# Altium PCB MAGIsDebugger.PcbDoc (part 2 of 2)
Units mil, origin at the board's own origin, x right, y up, seen from the top; angles counter-clockwise.
Board outline 6000 x 4000 mil, 2 copper layers (Top Layer, Bottom Layer); 31 components, 29 nets, 170 pads, 25 vias.
Unrouted connection lines stored in the file: 4.
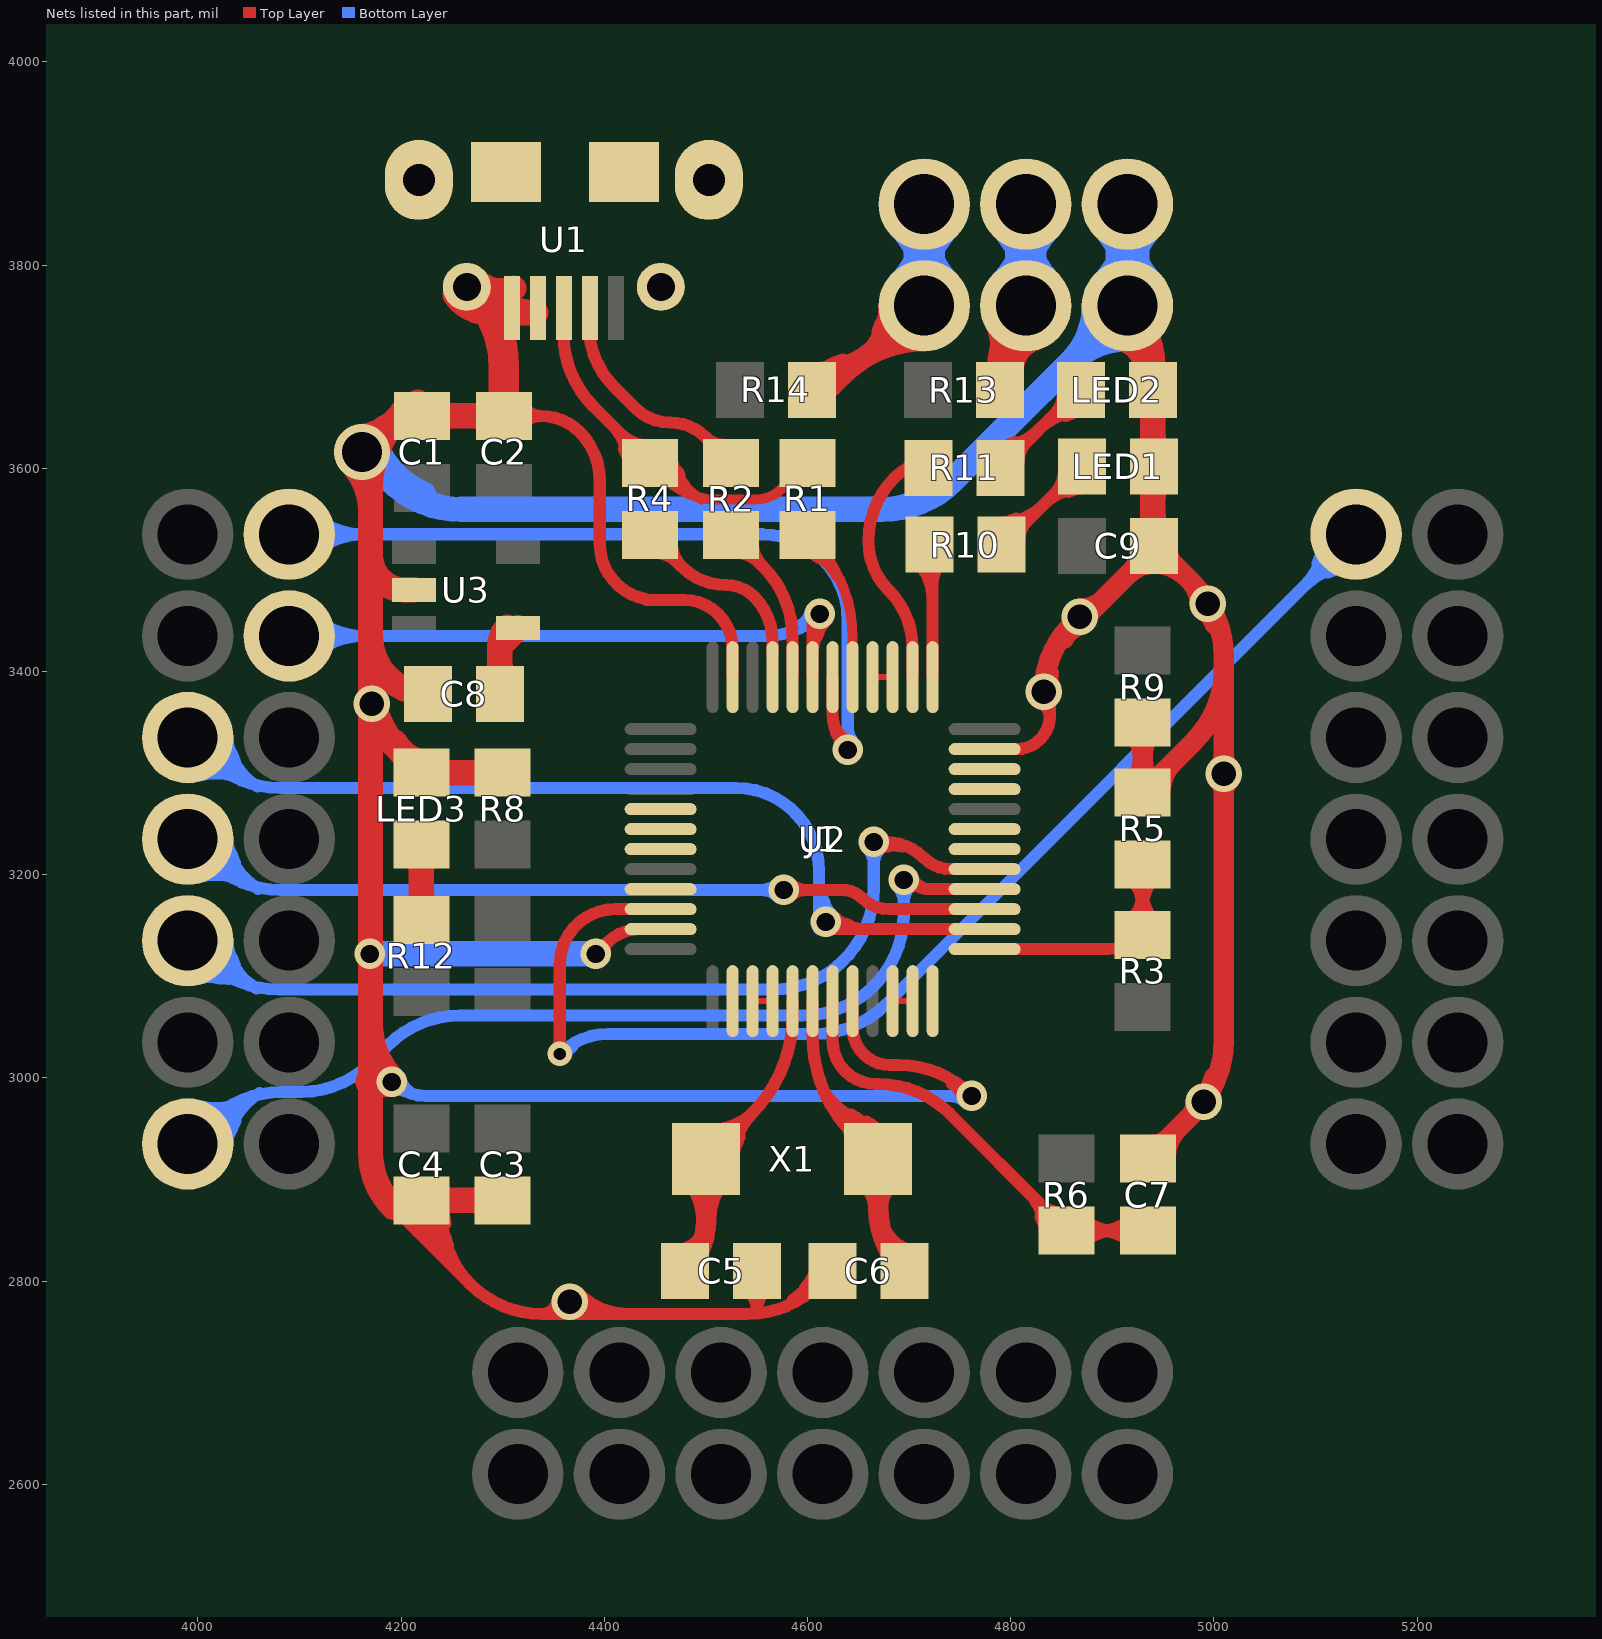
[diagram p2: the nets of this part, all layers, seen from the top]

## Via types
v1: diameter 30, hole 18, Top Layer to Bottom Layer, tented both sides, 10 vias
v2: diameter 36, hole 24, Top Layer to Bottom Layer, tented both sides, 7 vias
v3: diameter 24, hole 12, Top Layer to Bottom Layer, tented both sides, 5 vias
v4: diameter 47.24, hole 31.5, Top Layer to Bottom Layer, tented both sides, 1 vias
v5: diameter 55.12, hole 39.37, Top Layer to Bottom Layer, tented both sides, 1 vias
v6: diameter 31.5, hole 19.68, Top Layer to Bottom Layer, tented both sides, 1 vias

## Nets (pads, with @x,y where several pads share a name; then routed paths per layer and width w, separated by ;. In a path a pad name is that pad's centre, name@x,y a point inside that pad or via, vN(x,y) a via of type N, cw(c..) or ccw(c..) an arc to the next point about the centre after c; other vN are vias at no path point) (continued)
GND: C1.2 C2.2 C3.2 C4.2 C5.1 C6.1 C7.1 C8.2 C9.2 J1.1 LED1.2 LED2.2 LED3.2 R5.1 R8.1 R9.1 U1.0@4217.52,3883.86 U1.0@4264.76,3778.54 U1.0@4303.15,3891.73 U1.0@4419.29,3891.73 U1.0@4455.71,3778.54 U1.0@4502.95,3883.86 U1.4 U1.5 U2.2 U2.3 U2.4 U2.8 U2.10 U2.11 U2.12 U2.18 U2.19 U2.21 U2.22 U2.23 U2.27 U2.28 U2.35 U2.41 U2.42 U2.43 U2.45 U2.47 U3.2 | length 12117.1
  Top Layer w6: U2.3@4546.1,3075.55 U2.4@4565.79,3075.55 ; U2.28@4664.21,3394.45 U2.27@4683.9,3394.45 ; U2.10@4683.9,3075.55 U2.11@4703.58,3075.55 ; 4553.12,3075.55 cw(c4553.12,3082.57) 4548.16,3077.61 ccw(c4553.12,3082.57) 4553.12,3075.55 ; 4553.12,3075.55 ccw(c4553.12,3068.54) 4548.16,3073.5 cw(c4553.12,3068.54) 4553.12,3075.55 ; 4558.77,3075.55 cw(c4558.77,3068.54) 4563.73,3073.5 ccw(c4558.77,3068.54) 4558.77,3075.55 ; 4558.77,3075.55 ccw(c4558.77,3082.57) 4563.73,3077.61 cw(c4558.77,3082.57) 4558.77,3075.55 ; 4671.23,3394.45 cw(c4671.23,3401.46) 4666.27,3396.5 ccw(c4671.23,3401.46) 4671.23,3394.45 ; 4671.23,3394.45 ccw(c4671.23,3387.43) 4666.27,3392.39 cw(c4671.23,3387.43) 4671.23,3394.45 ; 4676.88,3394.45 cw(c4676.88,3387.43) 4681.84,3392.39 ccw(c4676.88,3387.43) 4676.88,3394.45 ; 4676.88,3394.45 ccw(c4676.88,3401.46) 4681.84,3396.5 cw(c4676.88,3401.46) 4676.88,3394.45 ; 4690.91,3075.55 cw(c4690.91,3082.57) 4685.95,3077.61 ccw(c4690.91,3082.57) 4690.91,3075.55 ; 4690.91,3075.55 ccw(c4690.91,3068.54) 4685.95,3073.5 cw(c4690.91,3068.54) 4690.91,3075.55 ; 4696.57,3075.55 cw(c4696.57,3068.54) 4701.53,3073.5 ccw(c4696.57,3068.54) 4696.57,3075.55 ; 4696.57,3075.55 ccw(c4696.57,3082.57) 4701.53,3077.61 cw(c4696.57,3082.57) 4696.57,3075.55
  Top Layer w12: 4192.44,2872.68 4268.11,2797.01 ; C4.2@4227.87,2884.59 cw(c4201.52,2850.97) C4.2@4243.93,2856.11 ; 4232.54,2853.73 ccw(c4200.66,2849.87) 4220.47,2875.14 cw(c4176.25,2818.72) 4247.41,2827.35 ; 4232.87,2851 cw(c4256.7,2853.89) C4.2@4237.81,2868.7 ; C2.2@4301.18,3651.57 4337.6,3651.57 ; v2@4354.25,2781.17 cw(c4338.82,2783.29) 4338.82,2767.72 ; v2(4366.14,2779.53) ccw(c4394.66,2808.04) 4394.66,2767.72 ; v2@4374.63,2788.01 ccw(c4423.63,2837.01) 4423.63,2767.72 ; v1(4391.73,3122.05) 4402.71,3133.03 ; U2.47@4455.55,3146.42 4435.04,3146.42 ccw(c4435.04,3100.7) 4402.71,3133.03 ; U2.35@4526.42,3394.45 4526.42,3422.4 ccw(c4478.35,3422.4) 4478.35,3470.47 4441.96,3470.47 cw(c4441.96,3471.33) 4441.1,3471.33 cw(c4450.79,3525.59) 4395.67,3525.59 4395.67,3587.99 ccw(c4328.18,3587.99) 4375.9,3635.71 ccw(c4337.6,3597.41) 4337.6,3651.57 ; 4549.02,2768.05 ccw(c4545.62,2771.45) 4550.43,2771.45 ; C5.1@4550.43,2810 4550.43,2771.45 ; 4597.22,2792.29 cw(c4614.63,2782.44) C6.1@4622.39,2800.88 ; 4599.02,2788.82 ccw(c4598.65,2831.53) C6.1@4629.12,2801.59 ; C6.1@4624.57,2810 4611.57,2797.01 cw(c4540.86,2867.72) 4540.86,2767.72 4338.82,2767.72 ; U2.8@4644.53,3075.55 4644.53,3049.24 ccw(c4681.1,3049.24) 4681.1,3012.67 4690.01,3012.67 cw(c4690.01,2912.67) 4760.72,2983.38 v1(4761.81,2982.28) ; 4744.63,2994.65 ccw(c4753.62,2999.84) v1@4758,2990.44 ; U2.23@4774.45,3323.58 4805.87,3323.58 ccw(c4805.87,3356.3) 4838.58,3356.3 4838.58,3365.66 ccw(c4818.42,3365.66) v2(4832.68,3379.92) ; 4268.11,2797.01 cw(c4334.9,2863.8) 4241.38,2877.09 ccw(c4334.9,2863.8) 4268.11,2797.01 ; 4268.11,2797.01 ccw(c4338.82,2867.72) 4338.82,2767.72 ; 4337.6,3651.57 cw(c4337.6,3672.7) 4319.89,3661.18 ccw(c4337.6,3672.7) 4337.6,3651.57 ; 4337.6,3651.57 ccw(c4337.6,3630.45) 4319.89,3641.97 cw(c4337.6,3630.45) 4337.6,3651.57 ; 4402.71,3133.03 cw(c4396.42,3139.31) 4394.09,3130.73 ccw(c4396.42,3139.31) 4402.71,3133.03 ; 4402.71,3133.03 ccw(c4409,3126.74) 4400.42,3124.41 cw(c4409,3126.74) 4402.71,3133.03 ; 4550.43,2771.45 cw(c4575.61,2771.45) 4560.8,2791.81 ccw(c4575.61,2771.45) 4550.43,2771.45 ; 4550.43,2771.45 ccw(c4525.26,2771.45) 4540.07,2791.81 cw(c4525.26,2771.45) 4550.43,2771.45 ; C4.2@4193.86,2883.84 ccw(c4215.92,2880.71) 4200.16,2864.95 cw(c4215.92,2880.71) C4.2@4193.86,2883.84 ; C4.2@4205.74,2882.15 ccw(c4245.66,2876.48) 4217.15,2847.97 cw(c4245.66,2876.48) C4.2@4205.74,2882.15 ; C4.2@4217.62,2880.46 ccw(c4275.41,2872.25) 4234.14,2830.98 cw(c4275.41,2872.25) C4.2@4217.62,2880.46 ; C4.2@4229.5,2878.78 ccw(c4305.15,2868.03) 4251.12,2813.99 cw(c4305.15,2868.03) C4.2@4229.5,2878.78 ; v1@4400.47,3124.2 cw(c4409.23,3126.37) 4404.72,3134.19 ccw(c4409.23,3126.37) v1@4400.47,3124.2 ; 4586.01,2781.95 ccw(c4562.32,2822.16) 4607.51,2810.48 cw(c4562.32,2822.16) 4586.01,2781.95 ; 4591.04,2784.91 cw(c4610.54,2751.81) 4620.15,2789 ccw(c4610.54,2751.81) 4591.04,2784.91 ; 4742.36,2993.98 cw(c4730.81,2973.98) 4753.12,2979.95 ccw(c4730.81,2973.98) 4742.36,2993.98 ; 4744.03,2993.01 ccw(c4754.21,3010.65) 4759.48,2990.98 cw(c4754.21,3010.65) 4744.03,2993.01 ; v2@4829.1,3368.47 cw(c4825.08,3355.57) 4838.58,3355.57 ccw(c4825.08,3355.57) v2@4829.1,3368.47
  Top Layer w20: v2(4832.68,3379.92) cw(c4925.92,3379.92) v2@4859.96,3445.83 ; 4853,3436.22 ccw(c4845.61,3449) v2@4860.05,3452.07 ; v2@4859.99,3445.85 v2(4867.87,3453.74) 4874,3453.74 C9.2@4940.94,3520.68 ; R9.1@4930,3349.57 R5.1@4930,3280.87 4980.55,3331.42 ccw(c4909.84,3402.13) 5009.84,3402.13 ; C7.1@4935,2920.43 4980.55,2965.99 ccw(c4909.84,3036.7) 5009.84,3036.7 5009.84,3402.13 ; C9.2@4940,3525.87 ccw(c4940.87,3525.87) 4940.87,3525 4980.55,3485.31 ; 4837.68,3398.58 cw(c4819.02,3403.58) 4828.68,3386.85 ccw(c4819.02,3403.58) 4837.68,3398.58 ; 4837.68,3398.58 ccw(c4856.33,3393.58) 4839.61,3383.92 cw(c4856.33,3393.58) 4837.68,3398.58 ; 4930,3313.75 cw(c4897.11,3313.75) 4920.37,3290.5 ccw(c4897.11,3313.75) 4930,3313.75 ; 4930,3313.75 ccw(c4962.89,3313.75) 4939.63,3290.5 cw(c4962.89,3313.75) 4930,3313.75 ; 4930,3316.68 cw(c4962.89,3316.68) 4939.63,3339.93 ccw(c4962.89,3316.68) 4930,3316.68 ; 4930,3316.68 ccw(c4897.11,3316.68) 4920.37,3339.93 cw(c4897.11,3316.68) 4930,3316.68 ; C9.2@4940.94,3506.06 cw(c4940.94,3460.54) 4973.14,3492.73 ccw(c4940.94,3460.54) C9.2@4940.94,3506.06 ; C9.2@4940.94,3506.06 ccw(c4940.94,3470.78) 4915.99,3495.73 cw(c4940.94,3470.78) C9.2@4940.94,3506.06 ; 4980.55,3485.31 cw(c4966.3,3471.05) 4986.2,3467.82 ccw(c4966.3,3471.05) 4980.55,3485.31 ; 4980.55,3485.31 cw(c4909.84,3414.6) 5009.84,3414.6 5009.84,3402.13 ; 5009.84,3279.9 cw(c5029.16,3279.9) 5015.5,3293.56 ccw(c5029.16,3279.9) 5009.84,3279.9 ; 5009.84,3279.9 ccw(c4990.53,3279.9) 5004.19,3293.56 cw(c4990.53,3279.9) 5009.84,3279.9 ; 5009.84,3318.53 cw(c4990.53,3318.53) 5004.19,3304.87 ccw(c4990.53,3318.53) 5009.84,3318.53 ; 5009.84,3318.53 ccw(c5029.16,3318.53) 5015.5,3304.87 cw(c5029.16,3318.53) 5009.84,3318.53 ; 4852.21,3432.39 cw(c4877.52,3417.79) 4869.95,3446.01 ccw(c4877.52,3417.79) 4852.21,3432.39 ; v2@4867.87,3461.74 ccw(c4867.87,3495.85) 4892,3471.73 cw(c4867.87,3495.85) v2@4867.87,3461.74 ; C9.2@4918.39,3498.13 ccw(c4896.84,3519.69) 4927.32,3519.69 cw(c4896.84,3519.69) C9.2@4918.39,3498.13 ; R5.1@4933.94,3294.49 ccw(c4933.94,3317.87) 4950.47,3301.34 cw(c4933.94,3317.87) R5.1@4933.94,3294.49 ; C7.1@4938.94,2934.06 ccw(c4938.94,2957.44) 4955.47,2940.9 cw(c4938.94,2957.44) C7.1@4938.94,2934.06 ; R5.1@4947.56,3280.87 cw(c4989.95,3280.87) 4959.98,3310.84 ccw(c4989.95,3280.87) R5.1@4947.56,3280.87 ; C7.1@4952.56,2920.43 cw(c4994.95,2920.43) 4964.98,2950.41 ccw(c4994.95,2920.43) C7.1@4952.56,2920.43 ; C9.2@4954.57,3519.69 ccw(c4974.81,3519.69) 4960.5,3505.37 cw(c4974.81,3519.69) C9.2@4954.57,3519.69 ; 4975.94,2961.38 ccw(c4960.94,2976.38) 4982.16,2976.38 cw(c4960.94,2976.38) 4975.94,2961.38 ; 4976.74,3489.13 cw(c4954.14,3466.54) 4986.09,3466.54 ccw(c4954.14,3466.54) 4976.74,3489.13 ; 4981.25,3484.43 cw(c4963.18,3470.03) 4986.15,3467.43 ccw(c4963.18,3470.03) 4981.25,3484.43 ; v2@4990.22,3459.53 cw(c4979.6,3440.32) 5000.69,3446.39 ccw(c4979.6,3440.32) v2@4990.22,3459.53 ; v2@4997.88,2978.45 cw(c5026.84,2986.21) 5000.88,3001.19 ccw(c5026.84,2986.21) v2@4997.88,2978.45
  Top Layer w25: v5@4176.31,3618.35 cw(c4198.29,3621.62) 4188.03,3641.33 ; v5@4176.34,3614.1 cw(c4220.32,3608.08) C1.2@4199.83,3647.47 ; 4181.78,3638.07 cw(c4199.14,3619.13) C1.2@4211.28,3641.77 ; 4192.44,2872.68 cw(c4246.62,2926.85) 4170,2926.85 4170,2996.06 4170,3391.85 ; U3.2@4212.6,3480.32 4203.46,3480.32 cw(c4203.46,3513.78) 4170,3513.78 ; C1.2@4216.37,3665.19 cw(c4209.65,3671.91) 4209.65,3662.4 4199.29,3652.05 ccw(c4270,3581.33) 4170,3581.33 4170,3513.78 ; C4.2@4220,2879.57 C3.2@4300,2879.57 ; C1.2@4220.47,3651.57 C2.2@4301.18,3651.57 ; C8.2@4226.38,3377.95 cw(c4226.38,3434.33) 4170,3434.33 ; U1.0@4268.26,3767.99 cw(c4278.56,3736.9) 4300.28,3761.4 ; U1.0@4277.7,3781.8 ccw(c4298.17,3807.84) U1.5@4310.82,3777.22 ; 4286.14,3753.45 ccw(c4290.19,3778.54) 4290.19,3753.12 U1.4@4332.68,3753.12 ; R8.1@4300,3300.43 LED3.2@4220,3300.43 4199.29,3321.14 cw(c4270,3391.85) 4170,3391.85 ; U1.5@4311.31,3755.37 ccw(c4316.91,3762.48) 4320.36,3754.11 ; J1.1@4915,3760 cw(c4854.64,3699.64) 4940,3699.64 C9.2@4940,3525.87 ; 4930.24,3710.8 ccw(c4962.17,3719.36) LED2.2@4945.64,3690.73 ; 4170,3391.85 4170,3434.33 ; 4170,3434.33 4170,3513.78 ; 4250.79,2879.57 cw(c4250.79,2906.42) 4231.8,2887.43 ccw(c4250.79,2906.42) 4250.79,2879.57 ; 4250.79,2879.57 ccw(c4250.79,2852.72) 4231.8,2871.7 cw(c4250.79,2852.72) 4250.79,2879.57 ; 4250.79,3300.43 cw(c4250.79,3327.28) 4231.8,3308.3 ccw(c4250.79,3327.28) 4250.79,3300.43 ; 4250.79,3300.43 ccw(c4250.79,3273.58) 4231.8,3292.57 cw(c4250.79,3273.58) 4250.79,3300.43 ; 4251.26,3651.57 cw(c4251.26,3678.43) 4232.27,3659.44 ccw(c4251.26,3678.43) 4251.26,3651.57 ; 4251.26,3651.57 ccw(c4251.26,3624.72) 4232.27,3643.71 cw(c4251.26,3624.72) 4251.26,3651.57 ; 4269.21,2879.57 cw(c4269.21,2852.72) 4288.2,2871.7 ccw(c4269.21,2852.72) 4269.21,2879.57 ; 4269.21,2879.57 ccw(c4269.21,2906.42) 4288.2,2887.43 cw(c4269.21,2906.42) 4269.21,2879.57 ; 4269.21,3300.43 cw(c4269.21,3273.58) 4288.2,3292.57 ccw(c4269.21,3273.58) 4269.21,3300.43 ; 4269.21,3300.43 ccw(c4269.21,3327.28) 4288.2,3308.3 cw(c4269.21,3327.28) 4269.21,3300.43 ; 4270.39,3651.57 cw(c4270.39,3624.72) 4289.38,3643.71 ccw(c4270.39,3624.72) 4270.39,3651.57 ; 4270.39,3651.57 ccw(c4270.39,3678.43) 4289.38,3659.44 cw(c4270.39,3678.43) 4270.39,3651.57 ; J1.1@4907.54,3728.37 cw(c4899.44,3694.01) LED2.2@4934.74,3694.01 ; J1.1@4907.54,3728.37 cw(c4899.44,3694.01) LED2.2@4934.74,3694.01 ; J1.1@4907.54,3728.37 cw(c4899.44,3694.01) LED2.2@4934.74,3694.01 ; v5@4150.77,3605.49 cw(c4104.34,3559.07) 4170,3559.07 ccw(c4104.34,3559.07) v5@4150.77,3605.49 ; v5@4155.49,3602.3 cw(c4146.06,3580.29) 4170,3580.29 ccw(c4146.06,3580.29) v5@4155.49,3602.3 ; v5@4160.03,3631.14 ccw(c4154.85,3687.35) 4202.45,3657.01 cw(c4154.85,3687.35) v5@4160.03,3631.14 ; 4170,3052.66 ccw(c4247.55,3052.66) 4192.71,2997.83 cw(c4247.55,3052.66) 4170,3052.66 ; 4186.88,2882.31 ccw(c4215.68,2898.94) 4216.34,2865.69 cw(c4215.68,2898.94) 4186.88,2882.31 ; 4193.99,3330.32 ccw(c4229.58,3350.87) 4218.94,3311.18 cw(c4229.58,3350.87) 4193.99,3330.32 ; U1.0@4253.18,3770.9 ccw(c4286.22,3792.7) 4286.22,3753.12 cw(c4286.22,3792.7) U1.0@4253.18,3770.9 ; U1.0@4274.05,3784.67 ccw(c4332.67,3823.37) 4332.67,3753.12 cw(c4332.67,3823.37) U1.0@4274.05,3784.67 ; LED2.2@4930.45,3686.66 ccw(c4893.23,3708.15) 4934.74,3719.27 cw(c4893.23,3708.15) LED2.2@4930.45,3686.66 ; LED2.2@4932.21,3665.36 cw(c4913.42,3646.57) 4940,3646.57 ccw(c4913.42,3646.57) LED2.2@4932.21,3665.36 ; C9.2@4933.08,3535.42 ccw(c4916.38,3552.13) 4940,3552.13 cw(c4916.38,3552.13) C9.2@4933.08,3535.42 ; LED1.2@4933.08,3589.97 cw(c4916.37,3573.26) 4940,3573.26 ccw(c4916.37,3573.26) LED1.2@4933.08,3589.97 ; LED1.2@4933.08,3613.57 ccw(c4916.37,3630.28) 4940,3630.28 cw(c4916.37,3630.28) LED1.2@4933.08,3613.57 ; 4940,3556.69 ccw(c4970.08,3556.69) 4948.81,3535.42 cw(c4970.08,3556.69) 4940,3556.69 ; 4940,3568.7 cw(c4970.08,3568.7) 4948.81,3589.97 ccw(c4970.08,3568.7) 4940,3568.7 ; 4940,3634.84 ccw(c4970.08,3634.84) 4948.81,3613.57 cw(c4970.08,3634.84) 4940,3634.84 ; 4940,3646.19 cw(c4967.12,3646.19) 4947.94,3665.36 ccw(c4967.12,3646.19) 4940,3646.19
  Top Layer w30: 4170,2996.06 v1(4190.94,2996.06) ; U1.0@4264.76,3778.54 4271.89,3771.42 cw(c4201.18,3700.7) 4286.14,3753.45 cw(c4201.18,3700.7) 4301.18,3700.7 C2.2@4301.18,3651.57 ; U1.0@4263.78,3769.98 cw(c4260.94,3745.38) 4280.34,3760.77 ccw(c4260.94,3745.38) U1.0@4263.78,3769.98
  Bottom Layer w12: v1(4190.94,2996.06) ccw(c4224.21,3029.33) 4224.21,2982.28 v1(4761.81,2982.28) ; 4209.76,2985.2 cw(c4220.63,3004.02) 4199.64,2998.39 ccw(c4220.63,3004.02) 4209.76,2985.2 ; 4209.76,2985.2 ccw(c4198.9,2966.38) 4193.27,2987.37 cw(c4198.9,2966.38) 4209.76,2985.2 ; 4740.08,2982.28 cw(c4740.08,2960.56) 4755.45,2975.92 ccw(c4740.08,2960.56) 4740.08,2982.28 ; 4740.08,2982.28 ccw(c4740.08,3004.01) 4755.45,2988.65 cw(c4740.08,3004.01) 4740.08,2982.28
  Bottom Layer w25: v5(4161.42,3616.14) 4188.77,3588.79 ccw(c4259.48,3659.5) 4259.48,3559.5 4673.08,3559.5 ccw(c4673.08,3659.5) 4743.79,3588.79 J1.1@4915,3760 ; v5@4162.93,3601.16 cw(c4167.62,3554.57) 4204.92,3582.88 ; v1(4169.29,3122.05) v1(4391.73,3122.05) ; 4859.52,3704.52 cw(c4915,3649.04) 4915,3727.5 ccw(c4915,3649.04) 4859.52,3704.52 ; 4859.52,3704.52 ccw(c4804.04,3760) 4882.5,3760 cw(c4804.04,3760) 4859.52,3704.52 ; v5@4175.36,3621.83 ccw(c4255.56,3654.54) 4221.98,3574.7 cw(c4255.56,3654.54) v5@4175.36,3621.83
  Bottom Layer w30: J1.1@4898.36,3784.96 ccw(c4884.69,3805.47) 4908.5,3811.85 ccw(c4947.16,3822.2) J1.1@4928.78,3786.65 ; J1.1@4901.22,3786.65 ccw(c4882.84,3822.2) 4921.5,3811.84 ccw(c4945.31,3805.47) J1.1@4931.64,3784.96 ; J1.1@4915,3760 J1.1@4915,3860 ; J1.1@4898.36,3835.04 cw(c4884.69,3814.53) 4908.5,3808.15 ; J1.1@4898.36,3835.04 cw(c4884.69,3814.53) 4908.5,3808.15 ; J1.1@4898.36,3835.04 cw(c4884.69,3814.53) 4908.5,3808.15 ; J1.1@4901.22,3833.35 cw(c4882.84,3797.8) 4921.5,3808.16 ; J1.1@4901.22,3833.35 cw(c4882.84,3797.8) 4921.5,3808.16 ; J1.1@4901.22,3833.35 cw(c4882.84,3797.8) 4921.5,3808.16 ; 4908.5,3808.16 cw(c4947.16,3797.8) J1.1@4928.78,3833.35 ; 4908.5,3808.16 cw(c4947.16,3797.8) J1.1@4928.78,3833.35 ; 4908.5,3808.16 cw(c4947.16,3797.8) J1.1@4928.78,3833.35 ; J1.1@4915,3787.57 cw(c4987.43,3787.57) 4936.21,3838.79 ccw(c4987.43,3787.57) J1.1@4915,3787.57 ; J1.1@4915,3787.57 ccw(c4842.57,3787.57) 4893.79,3838.79 cw(c4842.57,3787.57) J1.1@4915,3787.57 ; J1.1@4915,3832.43 cw(c4842.57,3832.43) 4893.79,3781.21 ccw(c4842.57,3832.43) J1.1@4915,3832.43 ; J1.1@4915,3832.43 ccw(c4987.43,3832.43) 4936.21,3781.21 cw(c4987.43,3832.43) J1.1@4915,3832.43 ; 4921.5,3808.15 cw(c4945.31,3814.53) J1.1@4931.64,3835.04 ; 4921.5,3808.15 cw(c4945.31,3814.53) J1.1@4931.64,3835.04 ; 4921.5,3808.15 cw(c4945.31,3814.53) J1.1@4931.64,3835.04
  other v2: 4990.16,2976.38 5009.84,3299.21 4171.26,3368.11 4994.09,3466.54
GRN: R10.2 U2.25 | length 265.1
  Top Layer w12: R10.2@4720,3525 cw(c4712.11,3517.11) 4723.27,3517.11 U2.25@4723.27,3394.45 ; R10.2@4707.54,3508.6 cw(c4669.57,3470.63) 4723.27,3470.63 ccw(c4669.57,3470.63) R10.2@4707.54,3508.6 ; 4723.27,3486.41 cw(c4754.65,3486.41) 4732.46,3508.6 ccw(c4754.65,3486.41) 4723.27,3486.41
NetC8_1: C8.1 U3.4 | length 270.6
  Top Layer w25: C8.1@4297.24,3377.95 4297.24,3425.2 U3.4@4314.96,3442.91 ; 4297.24,3408.74 cw(c4270.39,3408.74) 4289.38,3389.75 ccw(c4270.39,3408.74) 4297.24,3408.74 ; 4297.24,3408.74 ccw(c4324.09,3408.74) 4305.11,3389.75 cw(c4324.09,3408.74) 4297.24,3408.74 ; 4297.24,3425.57 cw(c4322.46,3425.57) U3.4@4304.63,3443.4 ; 4297.24,3425.57 cw(c4322.46,3425.57) U3.4@4304.63,3443.4 ; 4297.24,3425.57 cw(c4322.46,3425.57) U3.4@4304.63,3443.4 ; 4297.24,3425.57 cw(c4322.46,3425.57) U3.4@4304.63,3443.4 ; 4299.33,3427.29 ccw(c4283.71,3442.91) 4305.81,3442.91 cw(c4283.71,3442.91) 4299.33,3427.29
NetJ1_2: J1.2 R13.2 | length 1912.9
  Top Layer w25: R13.2@4781.89,3689.33 ccw(c4753.01,3721.07) 4795.87,3719.04 ; J1.2@4786.12,3745.1 cw(c4733.9,3718.15) R13.2@4789.88,3700.28 ; R13.2@4786.65,3690.15 cw(c4844.23,3671.77) J1.2@4825.22,3729.15 ; J1.2@4788.66,3740.96 cw(c4761.66,3721.44) 4793.4,3711.31 cw(c4815.57,3704.23) J1.2@4815.33,3727.5 ; R13.2@4789.37,3677.17 4789.37,3698.12 cw(c4876.88,3698.12) J1.2@4815,3760 ; R13.2@4800.24,3683.47 cw(c4839.42,3692.01) 4805.67,3713.68 ; J1.2@4788.21,3741.6 cw(c4745.73,3712.44) R13.2@4794.82,3696.77 ; J1.2@4788.21,3741.6 cw(c4745.73,3712.44) R13.2@4794.82,3696.77 ; J1.2@4788.21,3741.6 cw(c4745.73,3712.44) R13.2@4794.82,3696.77 ; J1.2@4791.76,3737.28 cw(c4779.91,3725.69) 4794.82,3718.45 ; J1.2@4791.76,3737.28 cw(c4779.91,3725.69) 4794.82,3718.45 ; J1.2@4791.76,3737.28 cw(c4779.91,3725.69) 4794.82,3718.45 ; 4792.35,3720.77 cw(c4805.61,3713.12) 4808.62,3728.13 ccw(c4805.61,3713.12) 4792.35,3720.77 ; 4792.35,3720.77 ccw(c4779.09,3728.43) 4790.59,3738.54 cw(c4779.09,3728.43) 4792.35,3720.77 ; R13.2@4794.82,3696.77 cw(c4843.9,3681.1) J1.2@4826.18,3729.48 ; R13.2@4794.82,3696.77 cw(c4843.9,3681.1) J1.2@4826.18,3729.48 ; R13.2@4794.82,3696.77 cw(c4843.9,3681.1) J1.2@4826.18,3729.48 ; 4794.82,3718.45 cw(c4809.72,3711.21) J1.2@4811.51,3727.69 ; 4794.82,3718.45 cw(c4809.72,3711.21) J1.2@4811.51,3727.69 ; 4794.82,3718.45 ccw(c4835.28,3707.61) 4799,3686.66 cw(c4835.28,3707.61) 4794.82,3718.45 ; 4794.82,3718.45 cw(c4809.72,3711.21) J1.2@4811.51,3727.69
  Bottom Layer w25: J1.2@4797.62,3787.46 ccw(c4786.01,3805.82) 4806.99,3811.44 ccw(c4836.66,3819.39) J1.2@4826.13,3790.53 ; J1.2@4803.87,3790.53 ccw(c4793.34,3819.39) 4823.01,3811.44 ccw(c4843.99,3805.82) J1.2@4832.38,3787.46 ; J1.2@4815,3760 J1.2@4815,3860 ; J1.2@4797.62,3832.54 cw(c4786.01,3814.18) 4806.99,3808.56 ; J1.2@4797.62,3832.54 cw(c4786.01,3814.18) 4806.99,3808.56 ; J1.2@4797.62,3832.54 cw(c4786.01,3814.18) 4806.99,3808.56 ; J1.2@4803.87,3829.47 cw(c4793.34,3800.61) 4823.01,3808.56 ; J1.2@4803.87,3829.47 cw(c4793.34,3800.61) 4823.01,3808.56 ; J1.2@4803.87,3829.47 cw(c4793.34,3800.61) 4823.01,3808.56 ; 4806.99,3808.56 cw(c4836.66,3800.61) J1.2@4826.13,3829.47 ; 4806.99,3808.56 cw(c4836.66,3800.61) J1.2@4826.13,3829.47 ; 4806.99,3808.56 cw(c4836.66,3800.61) J1.2@4826.13,3829.47 ; J1.2@4815,3781.54 cw(c4893.46,3781.54) 4837.98,3837.02 ccw(c4893.46,3781.54) J1.2@4815,3781.54 ; J1.2@4815,3781.54 ccw(c4736.54,3781.54) 4792.02,3837.02 cw(c4736.54,3781.54) J1.2@4815,3781.54 ; J1.2@4815,3838.46 cw(c4736.54,3838.46) 4792.02,3782.98 ccw(c4736.54,3838.46) J1.2@4815,3838.46 ; J1.2@4815,3838.46 ccw(c4893.46,3838.46) 4837.98,3782.98 cw(c4893.46,3838.46) J1.2@4815,3838.46 ; 4823.01,3808.56 cw(c4843.99,3814.18) J1.2@4832.38,3832.54 ; 4823.01,3808.56 cw(c4843.99,3814.18) J1.2@4832.38,3832.54 ; 4823.01,3808.56 cw(c4843.99,3814.18) J1.2@4832.38,3832.54
NetJ1_3: J1.3 R14.2 | length 1991.3
  Top Layer w16: R14.2@4604,3681.29 cw(c4647.83,3655.99) 4634.73,3704.87 ; R14.2@4615.39,3692.13 ccw(c4626.92,3703.62) 4631.13,3687.9 ccw(c4635.54,3671.43) R14.2@4619.25,3676.48 ; R14.2@4617.15,3689.99 R14.2@4604.33,3677.17 ccw(c4604.33,3704.38) 4623.57,3685.13 4625.54,3679.23 J1.3@4688.7,3742.38 ; 4671.07,3734.15 cw(c4719.43,3721.19) J1.3@4713.75,3770.93 ; 4681.27,3729.96 cw(c4686.46,3710.58) J1.3@4696.5,3727.96 ; J1.3@4686.73,3748.29 cw(c4715,3720.02) J1.3@4715,3760 ; R14.2@4604.33,3680.72 ccw(c4604.33,3735.54) 4643.09,3696.78 cw(c4604.33,3735.54) R14.2@4604.33,3680.72 ; R14.2@4604.33,3696.72 ccw(c4604.33,3790.17) 4670.41,3724.09 cw(c4604.33,3790.17) R14.2@4604.33,3696.72 ; 4637.01,3690.69 cw(c4715,3612.7) 4715,3723 ccw(c4715,3612.7) 4637.01,3690.69 ; 4657.98,3711.67 ccw(c4609.65,3760) 4678,3760 cw(c4609.65,3760) 4657.98,3711.67 ; 4664.32,3718.01 cw(c4715,3667.33) 4715,3739 ccw(c4715,3667.33) 4664.32,3718.01
  Bottom Layer w25: J1.3@4697.62,3787.46 ccw(c4686.01,3805.82) 4706.99,3811.44 ccw(c4736.66,3819.39) J1.3@4726.13,3790.53 ; J1.3@4703.87,3790.53 ccw(c4693.34,3819.39) 4723.01,3811.44 ccw(c4743.99,3805.82) J1.3@4732.38,3787.46 ; J1.3@4715,3760 J1.3@4715,3860 ; J1.3@4697.62,3832.54 cw(c4686.01,3814.18) 4706.99,3808.56 ; J1.3@4697.62,3832.54 cw(c4686.01,3814.18) 4706.99,3808.56 ; J1.3@4697.62,3832.54 cw(c4686.01,3814.18) 4706.99,3808.56 ; J1.3@4703.87,3829.47 cw(c4693.34,3800.61) 4723.01,3808.56 ; J1.3@4703.87,3829.47 cw(c4693.34,3800.61) 4723.01,3808.56 ; J1.3@4703.87,3829.47 cw(c4693.34,3800.61) 4723.01,3808.56 ; 4706.99,3808.56 cw(c4736.66,3800.61) J1.3@4726.13,3829.47 ; 4706.99,3808.56 cw(c4736.66,3800.61) J1.3@4726.13,3829.47 ; 4706.99,3808.56 cw(c4736.66,3800.61) J1.3@4726.13,3829.47 ; J1.3@4715,3781.54 cw(c4793.46,3781.54) 4737.98,3837.02 ccw(c4793.46,3781.54) J1.3@4715,3781.54 ; J1.3@4715,3781.54 ccw(c4636.54,3781.54) 4692.02,3837.02 cw(c4636.54,3781.54) J1.3@4715,3781.54 ; J1.3@4715,3838.46 cw(c4636.54,3838.46) 4692.02,3782.98 ccw(c4636.54,3838.46) J1.3@4715,3838.46 ; J1.3@4715,3838.46 ccw(c4793.46,3838.46) 4737.98,3782.98 cw(c4793.46,3838.46) J1.3@4715,3838.46 ; 4723.01,3808.56 cw(c4743.99,3814.18) J1.3@4732.38,3832.54 ; 4723.01,3808.56 cw(c4743.99,3814.18) J1.3@4732.38,3832.54 ; 4723.01,3808.56 cw(c4743.99,3814.18) J1.3@4732.38,3832.54
NetLED1_1: LED1.1 R10.1 | length 482.3
  Top Layer w12: R10.1@4784.81,3530.93 cw(c4813.2,3521.61) R10.1@4805.46,3550.47 ; R10.1@4790.87,3525 ccw(c4790.87,3530.89) 4795.03,3526.73 LED1.1@4870.08,3601.77 ; LED1.1@4856.39,3576.54 ccw(c4849.09,3603.77) LED1.1@4876.22,3596.1 ; R10.1@4790.87,3534.56 ccw(c4790.87,3563.53) 4811.35,3543.04 cw(c4790.87,3563.53) R10.1@4790.87,3534.56 ; R10.1@4790.87,3546.56 ccw(c4790.87,3604.5) 4831.84,3563.53 cw(c4790.87,3604.5) R10.1@4790.87,3546.56 ; R10.1@4808.49,3528.94 cw(c4835.63,3528.94) 4816.44,3548.13 ccw(c4835.63,3528.94) R10.1@4808.49,3528.94 ; 4833.28,3564.97 cw(c4870.08,3528.16) 4870.08,3580.21 ccw(c4870.08,3528.16) 4833.28,3564.97 ; 4842.78,3574.47 ccw(c4819.42,3597.83) 4852.46,3597.83 cw(c4819.42,3597.83) 4842.78,3574.47
NetLED2_1: LED2.1 R11.1 | length 482.3
  Top Layer w12: R11.1@4783.86,3606.07 cw(c4810.99,3598.39) R11.1@4803.69,3625.62 ; R11.1@4790,3600.39 4865.05,3675.44 cw(c4869.21,3671.27) LED2.1@4869.21,3677.17 ; LED2.1@4854.62,3651.7 ccw(c4846.88,3680.56) LED2.1@4875.27,3671.24 ; R11.1@4790,3621.95 ccw(c4790,3674) 4826.8,3637.2 cw(c4790,3674) R11.1@4790,3621.95 ; R11.1@4807.62,3604.33 cw(c4840.66,3604.33) 4817.3,3627.69 ccw(c4840.66,3604.33) R11.1@4807.62,3604.33 ; 4828.24,3638.64 cw(c4869.21,3597.67) 4869.21,3655.61 ccw(c4869.21,3597.67) 4828.24,3638.64 ; 4843.64,3654.03 ccw(c4824.44,3673.23) 4851.59,3673.23 cw(c4824.44,3673.23) 4843.64,3654.03 ; LED2.1@4848.73,3659.12 cw(c4869.21,3638.64) 4869.21,3667.61 ccw(c4869.21,3638.64) LED2.1@4848.73,3659.12
NetLED3_1: LED3.1 R12.1 | length 242.8
  Top Layer w25: R12.1@4220,3155.43 LED3.1@4220,3229.57 ; 4220,3182.28 cw(c4193.15,3182.28) 4212.14,3163.3 ccw(c4193.15,3182.28) 4220,3182.28 ; 4220,3182.28 ccw(c4246.85,3182.28) 4227.86,3163.3 cw(c4246.85,3182.28) 4220,3182.28 ; 4220,3202.72 cw(c4246.85,3202.72) 4227.86,3221.7 ccw(c4246.85,3202.72) 4220,3202.72 ; 4220,3202.72 ccw(c4193.15,3202.72) 4212.14,3221.7 cw(c4193.15,3202.72) 4220,3202.72
NetR1_2: R1.2 U2.29 | length 421.6
  Top Layer w10: R1.2@4600,3534.57 4604.69,3529.87 cw(c4508.53,3433.71) 4644.53,3433.71 U2.29@4644.53,3394.45 ; R1.2@4602.68,3535.13 ccw(c4619.71,3527.45) 4611.35,3510.74 ; R1.2@4611.49,3543.08 cw(c4588.96,3517.69) R1.2@4622.84,3519.71 ; R1.2@4611.8,3531.02 ccw(c4629.2,3523.16) 4620.65,3506.08 ; R1.2@4600.2,3516.32 cw(c4592.5,3478.81) 4624.47,3499.9 ccw(c4592.5,3478.81) R1.2@4600.2,3516.32 ; R1.2@4612.38,3532.83 ccw(c4639.31,3527.31) 4616.37,3512.18 cw(c4639.31,3527.31) R1.2@4612.38,3532.83 ; R1.2@4622.18,3530.83 ccw(c4672.75,3520.46) 4629.66,3492.03 cw(c4672.75,3520.46) R1.2@4622.18,3530.83
NetR2_2: R2.2 U2.32 | length 275.9
  Top Layer w12: R2.2@4525,3534.57 4556.18,3503.38 ; U2.32@4585.47,3394.45 4585.47,3432.67 ccw(c4485.47,3432.67) 4556.18,3503.38 ; 4556.18,3503.39 cw(c4580.51,3527.71) 4546.41,3532.24 ccw(c4580.51,3527.71) 4556.18,3503.39 ; R2.2@4528.94,3516.94 cw(c4528.94,3483.91) 4552.3,3507.27 ccw(c4528.94,3483.91) R2.2@4528.94,3516.94
NetR4_2: R4.2 U2.33 | length 303.6
  Top Layer w12: R4.2@4445,3534.57 4476.58,3502.98 ; U2.33@4565.79,3414.81 4565.79,3429.86 ccw(c4504.03,3429.86) 4547.7,3473.53 ccw(c4520,3445.83) 4520,3485 cw(c4520,3546.4) 4476.58,3502.98 ; 4476.58,3502.99 cw(c4501.72,3528.13) 4466.43,3532.43 ccw(c4501.72,3528.13) 4476.58,3502.99 ; R4.2@4448.94,3516.94 cw(c4448.94,3483.91) 4472.3,3507.27 ccw(c4448.94,3483.91) R4.2@4448.94,3516.94
NRST: C7.2 R6.1 U2.7 | length 852.8
  Top Layer w12: U2.7@4624.84,3075.55 4624.84,3036.57 ccw(c4667.32,3036.57) 4667.32,2994.09 4669.48,2994.09 cw(c4669.48,2894.09) 4740.19,2964.81 4836.92,2868.08 cw(c4819.4,2850.56) R6.1@4844.18,2850.56 ; R6.1@4829.73,2863.42 ccw(c4857.24,2870.79) R6.1@4849.28,2843.44 ; R6.1@4855,2849.57 C7.2@4935,2849.57 ; 4888.52,2849.57 cw(c4888.52,2807.02) 4918.6,2837.11 ccw(c4888.52,2807.02) 4888.52,2849.57 ; 4888.52,2849.57 ccw(c4888.52,2892.11) 4918.6,2862.03 cw(c4888.52,2892.11) 4888.52,2849.57 ; 4901.48,2849.57 cw(c4901.48,2892.11) 4871.4,2862.03 ccw(c4901.48,2892.11) 4901.48,2849.57 ; 4901.48,2849.57 ccw(c4901.48,2807.02) 4871.4,2837.11 cw(c4901.48,2807.02) 4901.48,2849.57 ; 4817.89,2887.11 cw(c4780.35,2849.57) 4833.44,2849.57 ccw(c4780.35,2849.57) 4817.89,2887.11 ; 4828.44,2876.56 ccw(c4851.06,2899.18) 4851.06,2867.19 cw(c4851.06,2899.18) 4828.44,2876.56
OSC_IN: C5.2 U2.5 X1.1 | length 917.6
  Top Layer w12: X1.1@4500.35,2920 4545.64,2965.28 ; X1.1@4501.91,2913.58 ccw(c4494.62,2952.87) X1.1@4533.26,2942.66 ; U2.5@4585.47,3075.55 4585.47,3061.45 cw(c4449.47,3061.45) 4545.64,2965.28 ; 4545.64,2965.28 cw(c4506.77,3004.15) 4502.49,2949.35 ccw(c4506.77,3004.15) 4545.64,2965.28 ; 4545.64,2965.28 ccw(c4588.66,2922.26) 4527.82,2922.06 cw(c4588.66,2922.26) 4545.64,2965.28 ; X1.1@4501.56,2937.39 ccw(c4504.1,2969.98) 4527.22,2946.86 cw(c4504.1,2969.98) X1.1@4501.56,2937.39 ; X1.1@4515.82,2922.02 cw(c4548.01,2922.13) 4525.25,2944.89 ccw(c4548.01,2922.13) X1.1@4515.82,2922.02
  Top Layer w20: C5.2@4479.57,2810 ccw(c4429.38,2860.18) 4500.35,2860.18 X1.1@4500.35,2920 ; 4500.35,2861.38 cw(c4557,2861.38) 4516.95,2901.44 ccw(c4557,2861.38) 4500.35,2861.38 ; 4500.35,2861.38 ccw(c4443.71,2861.38) 4483.76,2901.44 cw(c4443.71,2861.38) 4500.35,2861.38 ; C5.2@4476.89,2827.29 ccw(c4470.56,2858.93) 4498.5,2842.8 cw(c4470.56,2858.93) C5.2@4476.89,2827.29 ; C5.2@4492.72,2817.46 cw(c4518,2824.23) 4495.34,2837.32 ccw(c4518,2824.23) C5.2@4492.72,2817.46
OSC_OUT: C6.2 U2.6 X1.2 | length 981.1
  Top Layer w12: U2.6@4605.16,3075.55 4605.16,3040.82 ccw(c4741.16,3040.82) 4644.99,2944.65 X1.2@4669.65,2920 ; 4627.52,2971.34 cw(c4607.22,2928.6) X1.2@4654.27,2923.6 ; 4642.81,2964.08 cw(c4625.06,2926.71) X1.2@4666.2,2922.33 ; 4658.1,2956.82 cw(c4642.9,2924.81) X1.2@4678.13,2921.07 ; 4615.73,2987.07 ccw(c4691.14,3039.09) 4674.6,2948.98 cw(c4691.14,3039.09) 4615.73,2987.07 ; 4632.18,2963.22 ccw(c4683.75,2998.79) 4672.44,2937.18 cw(c4683.75,2998.79) 4632.18,2963.22 ; 4636.06,2957.61 cw(c4602.31,2934.33) 4642.63,2926.93 ccw(c4602.31,2934.33) 4636.06,2957.61
  Top Layer w20: X1.2@4669.65,2920 4669.65,2872.26 ; C6.2@4695.43,2810 cw(c4757.69,2872.26) 4669.65,2872.26 ; 4669.65,2872.26 cw(c4702.56,2872.26) 4683.34,2898.98 ccw(c4702.56,2872.26) 4669.65,2872.26 ; 4669.65,2872.26 ccw(c4636.73,2872.26) 4655.95,2898.98 cw(c4636.73,2872.26) 4669.65,2872.26 ; 4674.91,2845.55 ccw(c4709.21,2865.35) 4698.96,2827.09 cw(c4709.21,2865.35) 4674.91,2845.55 ; C6.2@4679.66,2837.32 cw(c4657,2824.23) 4682.28,2817.46 ccw(c4657,2824.23) C6.2@4679.66,2837.32
PA3-VREF: R3.1 R5.2 U2.13 | length 495.8
  Top Layer w12: U2.13@4774.45,3126.73 4895.88,3126.73 ccw(c4895.88,3174.99) R3.1@4930,3140.87 R5.2@4930,3210 ; 4930,3167.46 cw(c4972.54,3167.46) 4942.46,3197.54 ccw(c4972.54,3167.46) 4930,3167.46 ; 4930,3167.46 ccw(c4887.46,3167.46) 4917.54,3197.54 cw(c4887.46,3167.46) 4930,3167.46 ; 4930,3183.41 cw(c4887.46,3183.41) 4917.54,3153.33 ccw(c4887.46,3183.41) 4930,3183.41 ; 4930,3183.41 ccw(c4972.54,3183.41) 4942.46,3153.33 cw(c4972.54,3183.41) 4930,3183.41
RED: R11.2 U2.26 | length 252.1
  Top Layer w12: U2.26@4703.58,3394.45 4703.58,3423.07 ccw(c4623.07,3423.07) 4680,3480 cw(c4728.28,3528.28) 4660,3528.28 cw(c4748.64,3528.28) 4685.96,3590.96 4686.47,3591.47 cw(c4719.13,3558.81) R11.2@4719.13,3605
RXD: J1.8 U2.30 | length 1316.6
  Top Layer w12: U2.30@4624.84,3394.45 4624.84,3358.86 ccw(c4675.79,3358.86) v1(4639.76,3322.83) ; 4628.01,3339.66 cw(c4623.2,3331.33) v1@4631.76,3326.94 ; 4628.9,3341.65 cw(c4610.08,3330.79) 4631.07,3325.16 ccw(c4610.08,3330.79) 4628.9,3341.65 ; 4628.9,3341.65 ccw(c4647.72,3352.52) 4642.09,3331.53 cw(c4647.72,3352.52) 4628.9,3341.65
  Bottom Layer w12: J1.8@4090,3535 4555.55,3535 cw(c4555.55,3450.79) 4639.76,3450.79 v1(4639.76,3322.83) ; 4133.46,3535 cw(c4133.46,3578.46) 4102.73,3547.73 ccw(c4133.46,3578.46) 4133.46,3535 ; 4133.46,3535 ccw(c4133.46,3491.54) 4102.73,3522.27 cw(c4133.46,3491.54) 4133.46,3535 ; 4162.43,3535 cw(c4162.43,3607.43) 4111.21,3556.21 ccw(c4162.43,3607.43) 4162.43,3535 ; 4162.43,3535 ccw(c4162.43,3462.57) 4111.21,3513.79 cw(c4162.43,3462.57) 4162.43,3535 ; 4639.76,3344.56 cw(c4618.04,3344.56) 4633.4,3329.2 ccw(c4618.04,3344.56) 4639.76,3344.56 ; 4639.76,3344.56 ccw(c4661.49,3344.56) 4646.13,3329.2 cw(c4661.49,3344.56) 4639.76,3344.56
TCK: J1.32 U2.15 | length 1390.7
  Top Layer w12: v1(4576.77,3185.04) 4634.53,3185.04 cw(c4634.53,3158.16) 4653.54,3177.17 ccw(c4680.25,3203.87) 4680.25,3166.1 U2.15@4774.45,3166.1 ; 4598.5,3185.04 cw(c4598.5,3206.77) 4583.14,3191.4 ccw(c4598.5,3206.77) 4598.5,3185.04 ; 4598.5,3185.04 ccw(c4598.5,3163.31) 4583.14,3178.68 cw(c4598.5,3163.31) 4598.5,3185.04
  Bottom Layer w12: J1.32@3989.35,3243.98 cw(c3992.67,3198.05) 4036.66,3211.67 ; J1.32@3990,3235 4010.67,3214.33 ccw(c4081.38,3285.04) 4081.38,3185.04 v1(4576.77,3185.04) ; 4555.04,3185.04 cw(c4555.04,3163.31) 4570.41,3178.68 ccw(c4555.04,3163.31) 4555.04,3185.04 ; 4555.04,3185.04 ccw(c4555.04,3206.77) 4570.41,3191.4 cw(c4555.04,3206.77) 4555.04,3185.04 ; J1.32@3996.99,3208.92 cw(c4007.17,3170.91) 4026.85,3204.99 ccw(c4007.17,3170.91) J1.32@3996.99,3208.92 ; J1.32@4000.09,3197.33 cw(c4017.78,3131.34) 4051.94,3190.5 ccw(c4017.78,3131.34) J1.32@4000.09,3197.33 ; J1.32@4016.98,3236.04 ccw(c4063.96,3237.85) 4040.45,3197.13 cw(c4063.96,3237.85) J1.32@4016.98,3236.04 ; J1.32@4028.97,3236.5 ccw(c4089.64,3238.84) 4059.28,3186.26 cw(c4089.64,3238.84) J1.32@4028.97,3236.5
TDI: J1.33 U2.17 | length 1550.4
  Top Layer w12: v1(4665.35,3232.28) 4676.55,3232.28 cw(c4676.55,3178.52) 4714.57,3216.54 ccw(c4741.28,3243.24) 4741.28,3205.47 U2.17@4774.45,3205.47 ; v1@4669.85,3224.49 cw(c4685.66,3197.11) 4693.85,3227.65 ccw(c4685.66,3197.11) v1@4669.85,3224.49 ; v1@4673.15,3236.78 ccw(c4683.4,3242.7) 4680.34,3231.27 cw(c4683.4,3242.7) v1@4673.15,3236.78
  Bottom Layer w12: J1.33@3975.21,3120.09 ccw(c4030.09,3175.41) 4030.4,3097.49 ; J1.33@3989.54,3143.99 cw(c3991.93,3097.58) 4036.48,3110.81 ; J1.33@3990,3135 4008.81,3116.19 ccw(c4079.52,3186.9) 4009.1,3115.9 ccw(c4079.52,3186.9) 4079.52,3086.9 4565.35,3086.9 ccw(c4565.35,3186.9) 4657.52,3148.09 ccw(c4565.35,3186.9) 4665.35,3186.9 v1(4665.35,3232.28) ; 4665.35,3210.56 cw(c4687.08,3210.56) 4671.72,3225.92 ccw(c4687.08,3210.56) 4665.35,3210.56 ; 4665.35,3210.56 ccw(c4643.63,3210.56) 4658.99,3225.92 cw(c4643.63,3210.56) 4665.35,3210.56 ; J1.33@3997.09,3108.95 cw(c4007.85,3069.42) 4028.19,3104.98 ccw(c4007.85,3069.42) J1.33@3997.09,3108.95 ; J1.33@4000.24,3097.37 cw(c4018.62,3029.89) 4053.34,3090.6 ccw(c4018.62,3029.89) J1.33@4000.24,3097.37 ; J1.33@4016.99,3135.73 ccw(c4060.96,3136.91) 4039.12,3098.73 cw(c4060.96,3136.91) J1.33@4016.99,3135.73 ; J1.33@4028.99,3136.05 ccw(c4085.93,3137.58) 4057.65,3088.13 cw(c4085.93,3137.58) J1.33@4028.99,3136.05
TDO: J1.35 U2.16 | length 1474.5
  Top Layer w12: v1@4706.7,3190.94 ccw(c4719.14,3203.4) 4719.14,3185.79 U2.16@4774.45,3185.79 ; v1@4699.39,3187.09 cw(c4706.38,3175.03) 4713.34,3187.11 ccw(c4706.38,3175.03) v1@4699.39,3187.09 ; v1@4703.56,3197.21 ccw(c4716.32,3200.63) 4709.72,3189.2 cw(c4716.32,3200.63) v1@4703.56,3197.21
  Bottom Layer w12: J1.35@3989.16,2926.04 ccw(c3993.42,2971.43) 4036.81,2957.45 ; J1.35@3990,2935 4011.93,2956.93 cw(c4082.64,2886.22) 4082.64,2986.22 4101.94,2986.22 ccw(c4101.94,3081.13) 4169.05,3014.02 4187.05,3032.02 cw(c4257.76,2961.31) 4257.76,3061.31 4594.87,3061.31 ccw(c4594.87,3161.31) 4694.87,3161.31 v1(4694.87,3194.88) ; 4694.87,3173.15 cw(c4716.6,3173.15) 4701.24,3188.51 ccw(c4716.6,3173.15) 4694.87,3173.15 ; 4694.87,3173.15 ccw(c4673.14,3173.15) 4688.51,3188.51 cw(c4673.14,3173.15) 4694.87,3173.15 ; J1.35@3996.99,2961.08 ccw(c4006.77,2997.57) 4025.65,2964.85 cw(c4006.77,2997.57) J1.35@3996.99,2961.08 ; J1.35@4000.09,2972.67 ccw(c4017.37,3037.14) 4050.74,2979.34 cw(c4017.37,3037.14) J1.35@4000.09,2972.67 ; J1.35@4016.97,2933.66 cw(c4066.47,2931.19) 4041.69,2974.11 ccw(c4066.47,2931.19) J1.35@4016.97,2933.66 ; J1.35@4028.95,2933.06 cw(c4092.67,2929.88) 4060.77,2985.13 ccw(c4092.67,2929.88) J1.35@4028.95,2933.06
TMS: J1.31 U2.14 | length 1514.4
  Top Layer w12: v1@4625,3146.42 U2.14@4774.45,3146.42 ; v1@4624.99,3147.74 cw(c4634.53,3139.68) 4640.77,3150.5 ; v1@4624.47,3159.91 ccw(c4657.04,3192.47) 4657.04,3146.42 cw(c4657.04,3192.47) v1@4624.47,3159.91
  Bottom Layer w12: J1.31@3989.42,3343.98 cw(c3992.41,3297.86) 4036.62,3311.37 ; J1.31@3990,3335 4010.28,3314.72 ccw(c4080.99,3385.43) 4080.99,3285.43 4529.53,3285.43 cw(c4529.53,3203.54) 4611.42,3203.54 v1@4611.42,3146.42 ; v1@4612.56,3160.63 ccw(c4605.41,3169.75) 4615.45,3175.54 ; J1.31@3996.99,3308.92 cw(c4007.3,3270.43) 4027.22,3304.94 ccw(c4007.3,3270.43) J1.31@3996.99,3308.92 ; J1.31@4000.09,3297.33 cw(c4017.9,3230.86) 4052.31,3290.45 ccw(c4017.9,3230.86) J1.31@4000.09,3297.33 ; J1.31@4016.98,3335.94 ccw(c4063.18,3337.55) 4040.07,3297.52 cw(c4063.18,3337.55) J1.31@4016.98,3335.94 ; J1.31@4028.98,3336.36 ccw(c4088.69,3338.44) 4058.82,3286.7 cw(c4088.69,3338.44) J1.31@4028.98,3336.36 ; 4611.42,3191.43 ccw(c4656,3191.43) 4624.47,3159.91 cw(c4656,3191.43) 4611.42,3191.43
  other v1: 4618.11,3153.54
TRST: J1.28 U2.46 | length 1767.1
  Top Layer w12: v3(4356.3,3023.62) 4356.3,3111.62 cw(c4410.78,3111.62) 4410.78,3166.1 U2.46@4455.55,3166.1 ; 4356.3,3038.11 cw(c4341.81,3038.11) 4352.06,3027.86 ccw(c4341.81,3038.11) 4356.3,3038.11 ; 4356.3,3038.11 ccw(c4370.78,3038.11) 4360.54,3027.86 cw(c4370.78,3038.11) 4356.3,3038.11
  Bottom Layer w12: v3(4356.3,3023.62) cw(c4403.82,2976.1) 4403.82,3043.31 4606.89,3043.31 ccw(c4606.89,3143.31) 4677.6,3072.6 J1.28@5140,3535 ; 5102.39,3506.58 cw(c5148.34,3494.27) J1.28@5138.8,3540.88 ; 5111.58,3497.39 ccw(c5099.27,3543.34) J1.28@5145.88,3533.8 ; 4368.84,3030.86 cw(c4361.6,3043.41) 4357.85,3029.42 ccw(c4361.6,3043.41) 4368.84,3030.86 ; 4368.84,3030.86 ccw(c4376.09,3018.32) 4362.09,3022.07 cw(c4376.09,3018.32) 4368.84,3030.86 ; 5088.79,3483.79 cw(c5140,3432.57) 5140,3505 ccw(c5140,3432.57) 5088.79,3483.79 ; 5088.79,3483.79 ccw(c5037.57,3535) 5110,3535 cw(c5037.57,3535) 5088.79,3483.79 ; 5109.27,3504.27 cw(c5140,3473.54) 5140,3517 ccw(c5140,3473.54) 5109.27,3504.27 ; 5109.27,3504.27 ccw(c5078.54,3535) 5122,3535 cw(c5078.54,3535) 5109.27,3504.27
TXD: J1.9 U2.31 | length 1111.7
  Top Layer w12: U2.31@4605.16,3394.45 v1@4605.16,3456.69 ; v1@4606.44,3449.78 cw(c4598.56,3440.31) 4609.23,3434.15 ; U2.31@4605.16,3417.95 cw(c4650.95,3417.95) 4618.57,3450.33 ccw(c4650.95,3417.95) U2.31@4605.16,3417.95
  Bottom Layer w12: J1.9@4090,3435 4559.83,3435 ccw(c4559.83,3509.06) v1(4612.2,3456.69) ; 4133.46,3435 cw(c4133.46,3478.46) 4102.73,3447.73 ccw(c4133.46,3478.46) 4133.46,3435 ; 4133.46,3435 ccw(c4133.46,3391.54) 4102.73,3422.27 cw(c4133.46,3391.54) 4133.46,3435 ; 4162.43,3435 cw(c4162.43,3507.43) 4111.21,3456.21 ccw(c4162.43,3507.43) 4162.43,3435 ; 4162.43,3435 ccw(c4162.43,3362.57) 4111.21,3413.79 cw(c4162.43,3362.57) 4162.43,3435 ; 4593.39,3445.83 cw(c4604.25,3427.01) 4609.88,3448 ccw(c4604.25,3427.01) 4593.39,3445.83 ; 4593.39,3445.83 ccw(c4582.52,3464.65) 4603.51,3459.02 cw(c4582.52,3464.65) 4593.39,3445.83
USBDM: R2.1 U1.2 | length 337
  Top Layer w12: U1.2@4385.59,3782.34 ccw(c4387.02,3780.92) 4385,3780.92 4385,3740 ccw(c4469.5,3740) 4409.75,3680.25 4430.86,3659.14 ccw(c4465,3693.28) 4465,3645 cw(c4465,3595.67) 4499.88,3630.55 ; R2.1@4525,3605.43 4499.88,3630.55 ; 4499.88,3630.55 cw(c4486.56,3617.23) 4504.39,3611.13 ccw(c4486.56,3617.23) 4499.88,3630.55 ; 4499.88,3630.55 ccw(c4518.21,3648.87) 4519.91,3623.02 cw(c4518.21,3648.87) 4499.88,3630.55
USBDP: R1.1 R4.1 U1.3 | length 900
  Top Layer w10: R4.1@4445,3605.43 4460.91,3589.52 ccw(c4510,3638.61) 4510,3569.19 4548.9,3569.19 ccw(c4548.9,3606.1) 4575,3580 ; R4.1@4448.7,3606.79 cw(c4452.9,3582.4) 4475.04,3593.48 ; R4.1@4450.4,3596.94 cw(c4455.29,3568.53) 4481.06,3581.43 ; R1.1@4600,3605.43 4600,3605 4575,3580 ; 4575,3580 cw(c4591.93,3563.07) 4594.25,3586.9 ccw(c4591.93,3563.07) 4575,3580 ; 4575,3580 ccw(c4562.89,3592.11) 4578.78,3598.49 cw(c4562.89,3592.11) 4575,3580 ; R4.1@4453.76,3587.45 cw(c4458.51,3569.72) 4467.68,3585.61 ccw(c4458.51,3569.72) R4.1@4453.76,3587.45 ; R4.1@4457.38,3607.16 ccw(c4496.76,3615.24) 4476.66,3580.43 cw(c4496.76,3615.24) R4.1@4457.38,3607.16 ; R4.1@4467.18,3609.17 ccw(c4525.89,3621.21) 4495.93,3569.31 cw(c4525.89,3621.21) R4.1@4467.18,3609.17
  Top Layer w12: U1.3@4360,3782.34 4360,3731.85 ccw(c4460,3731.85) 4389.29,3661.14 R4.1@4445,3605.43 ; R4.1@4419.77,3619.12 ccw(c4447,3626.42) R4.1@4439.33,3599.3 ; 4408.2,3642.24 cw(c4371.39,3605.43) 4423.44,3605.43 ccw(c4371.39,3605.43) 4408.2,3642.24 ; 4417.7,3632.73 ccw(c4441.06,3656.09) 4441.06,3623.05 cw(c4441.06,3656.09) 4417.7,3632.73
pads on no net: J1.10 J1.11 J1.12 J1.13 J1.14 J1.15 J1.16 J1.17 J1.18 J1.19 J1.20 J1.21 J1.22 J1.23 J1.24 J1.25 J1.26 J1.27 J1.29 J1.30 J1.34 J1.36 J1.37 J1.38 J1.39 J1.40 J1.41 J1.42 J1.43 J1.44 J1.45 J1.46 J1.47 J1.48 J1.49 U1.0@4217.52,3883.86 U1.0@4264.76,3778.54 U1.0@4455.71,3778.54 U1.0@4502.95,3883.86 U2.34 U2.37 U2.38 U2.39 U2.40

## Polygon pours and split planes (outlines as drawn)
GND on Bottom Layer "Bottom Layer-No Net" (solid, pour order 2): 3898.45,3956.9 5333.49,3956.9 5333.49,2512.02 3896.48,2512.02
GND on Top Layer "Bottom Layer-No Net" (solid, pour order 4): 3894.79,3959.11 5329.83,3959.11 5329.83,2514.23 3892.83,2514.23 3892.83,2520.92

## Other copper
Top Layer:
  text "MAGI" at 5057.09,3807.09 h39.37
  text "CMSIS" at 3998.03,3781.5 h39.37
  text "Debugger" at 4976.38,3742.13 h39.37
  text "DAP" at 4037.4,3722.44 h39.37

## Text inside footprints (layer, text, board x,y; h text height)
J1: Bottom Layer "MAGI" at 5220,2640 h31.5; Bottom Overlay "NRST" at 5086.54,3519.33 h31.5; Bottom Overlay "PB8" at 5086.54,3418.94 h31.5; Bottom Overlay "PB9" at 5086.54,3318.54 h31.5; Bottom Overlay "PB1" at 5086.54,3218.15 h31.5; Bottom Overlay "PB0" at 5086.54,3117.76 h31.5; Bottom Overlay "PC5" at 5086.54,3017.36 h31.5; Bottom Overlay "PC4" at 5086.54,2916.97 h31.5; Bottom Overlay "PA0" at 4238.11,2926.81 h31.5; Bottom Overlay "PA1" at 4228.27,3027.2 h31.5; Bottom Overlay "PA2" at 4228.27,3125.63 h31.5; Bottom Overlay "PA3" at 4228.27,3226.02 h31.5; Bottom Overlay "PA8" at 4228.27,3326.42 h31.5; Bottom Overlay "PA9" at 4228.27,3428.78 h31.5; Bottom Overlay "PA10" at 4253.86,3525.24 h31.5; Bottom Overlay "BOOT0" at 4287.32,3576.42 h31.5; Bottom Overlay "PB2" at 4226.3,3476.02 h31.5; Bottom Overlay "PA13" at 4253.86,3375.63 h31.5; Bottom Overlay "PA14" at 4253.86,3275.24 h31.5; Bottom Overlay "PA15" at 4253.86,3174.84 h31.5; Bottom Overlay "PB3" at 4238.11,3078.39 h31.5; Bottom Overlay "PB4" at 4238.11,2977.99 h31.5; Bottom Overlay "PB5" at 4238.11,2877.6 h31.5; Bottom Overlay "PB12" at 4362.13,2814.61 h23.62; Bottom Overlay "PB11" at 4462.52,2814.61 h23.62; Bottom Overlay "PB10" at 4562.91,2814.61 h23.62; Bottom Overlay "PA4" at 4661.34,2816.57 h31.5; Bottom Overlay "PA7" at 4761.73,2816.57 h31.5; Bottom Overlay "PA6" at 4862.13,2816.57 h31.5; Bottom Overlay "PA5" at 4962.52,2816.57 h31.5; Bottom Overlay "PB6" at 4301.1,2765.39 h31.5; Bottom Overlay "PB7" at 4403.46,2765.39 h31.5; Bottom Overlay "PB13" at 4503.86,2767.36 h23.62; Bottom Overlay "PC0" at 4604.25,2765.39 h31.5; Bottom Overlay "PC1" at 4704.65,2765.39 h31.5; Bottom Overlay "PC2" at 4805.04,2765.39 h31.5; Bottom Overlay "PC3" at 4901.5,2765.39 h31.5; Bottom Overlay "PC13" at 5011.73,2769.33 h23.62; Bottom Overlay "PC6" at 5086.54,2867.76 h31.5; Bottom Overlay "PC7" at 5086.54,2968.15 h31.5; Bottom Overlay "PC8" at 5086.54,3068.54 h31.5; Bottom Overlay "PC9" at 5086.54,3168.94 h31.5; Bottom Overlay "PC10" at 5086.54,3267.36 h31.5; Bottom Overlay "PC11" at 5086.54,3367.76 h31.5; Bottom Overlay "PC12" at 5086.54,3470.12 h31.5; Bottom Overlay "PD2" at 5086.54,3570.51 h31.5; Bottom Overlay "GND" at 4959.57,3664.84 h31.5; Bottom Overlay "3V3" at 4854.57,3664.84 h31.5; Bottom Overlay "5V" at 4744.57,3664.84 h31.5
U3: Mechanical 15 "1" at 4281.49,3473.85 h29.53 r90